# Altium PCB Sheet1.PcbDoc
Units mil, origin at the board's own origin, x right, y up, seen from the top; angles counter-clockwise.
Board outline 2225 x 1800 mil, 2 copper layers (Top Layer, Bottom Layer), stack 33.512 mil thick; 20 components, 48 nets, 142 pads, 19 vias.
Unrouted connection lines stored in the file: 1.
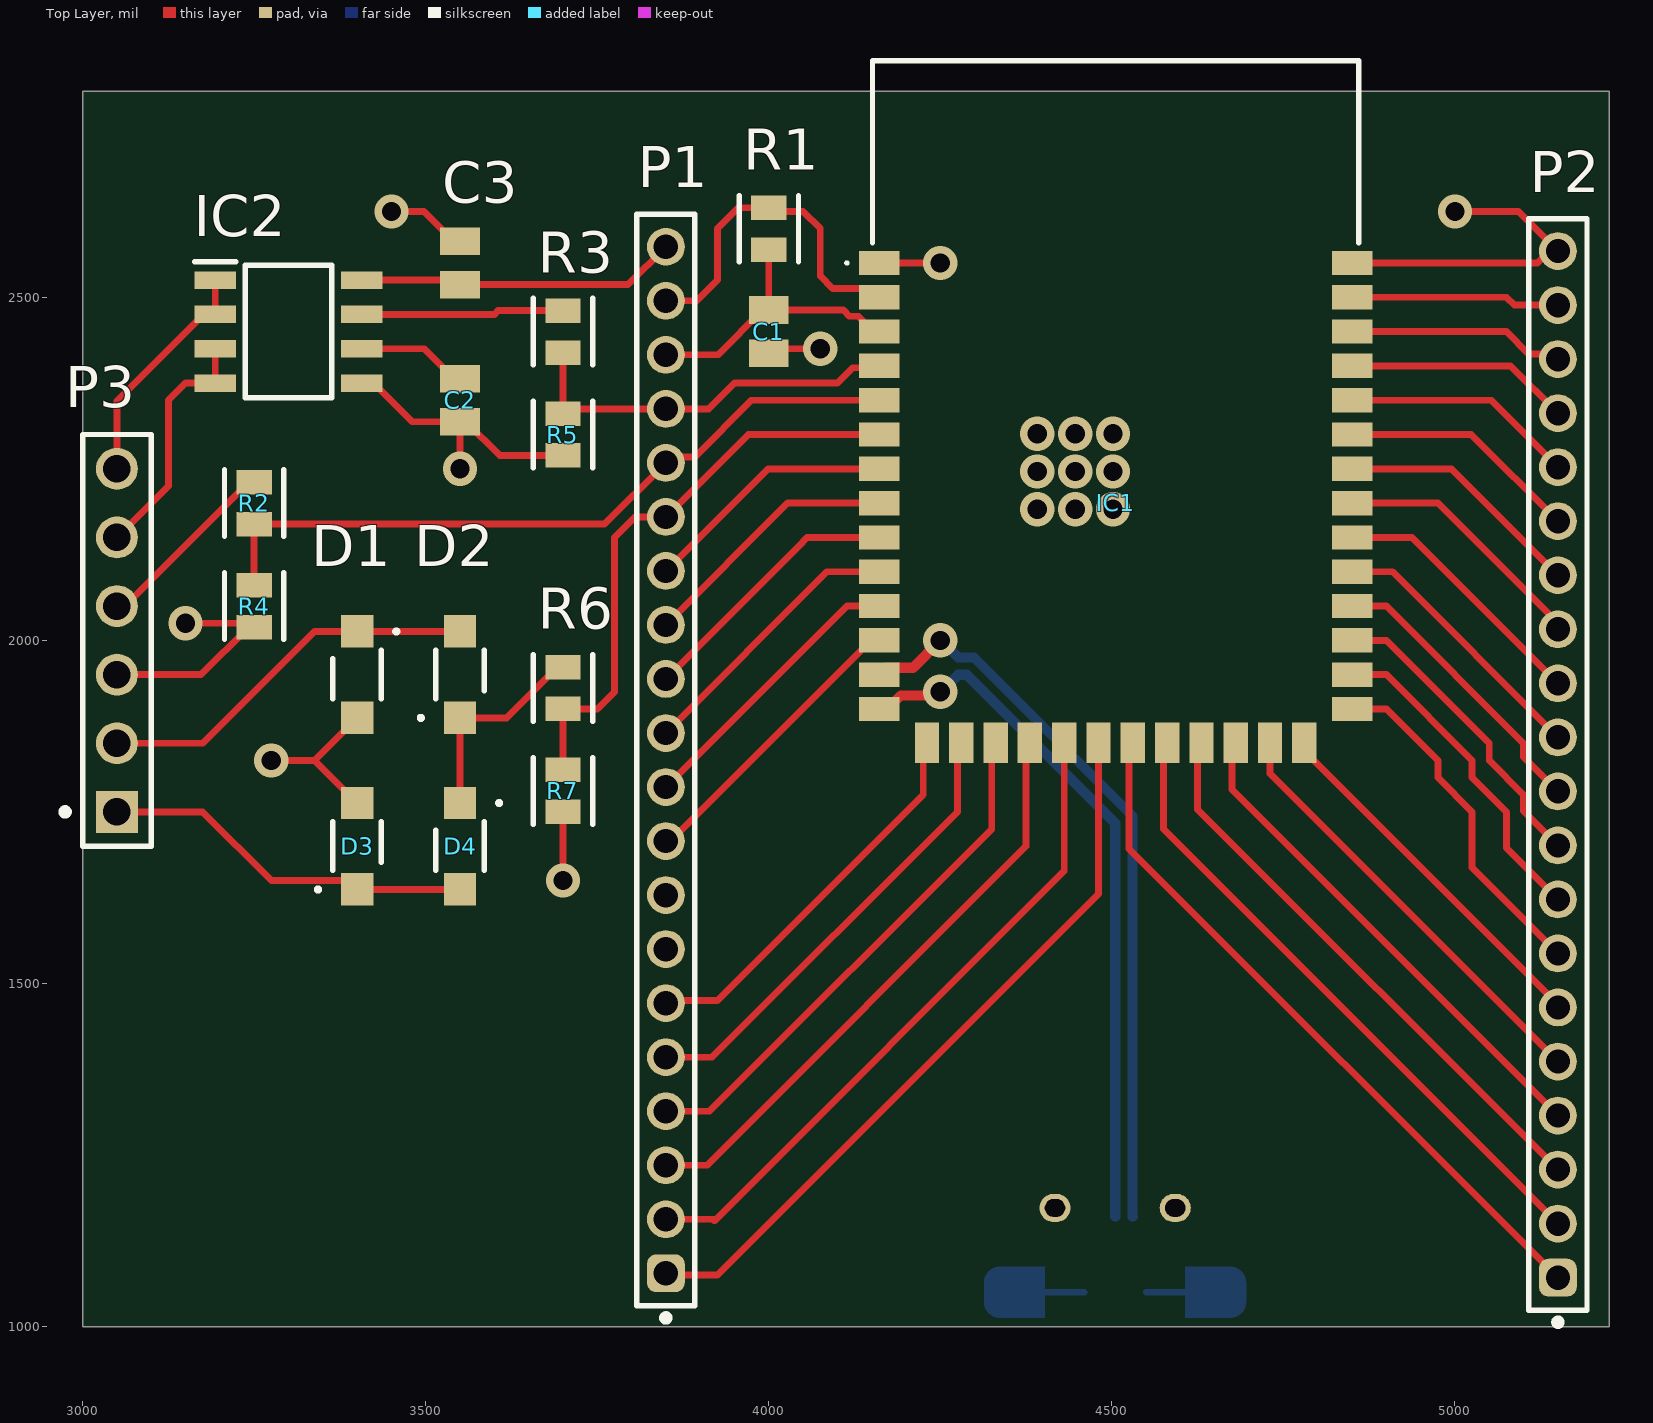
[diagram p0: Top Layer view]
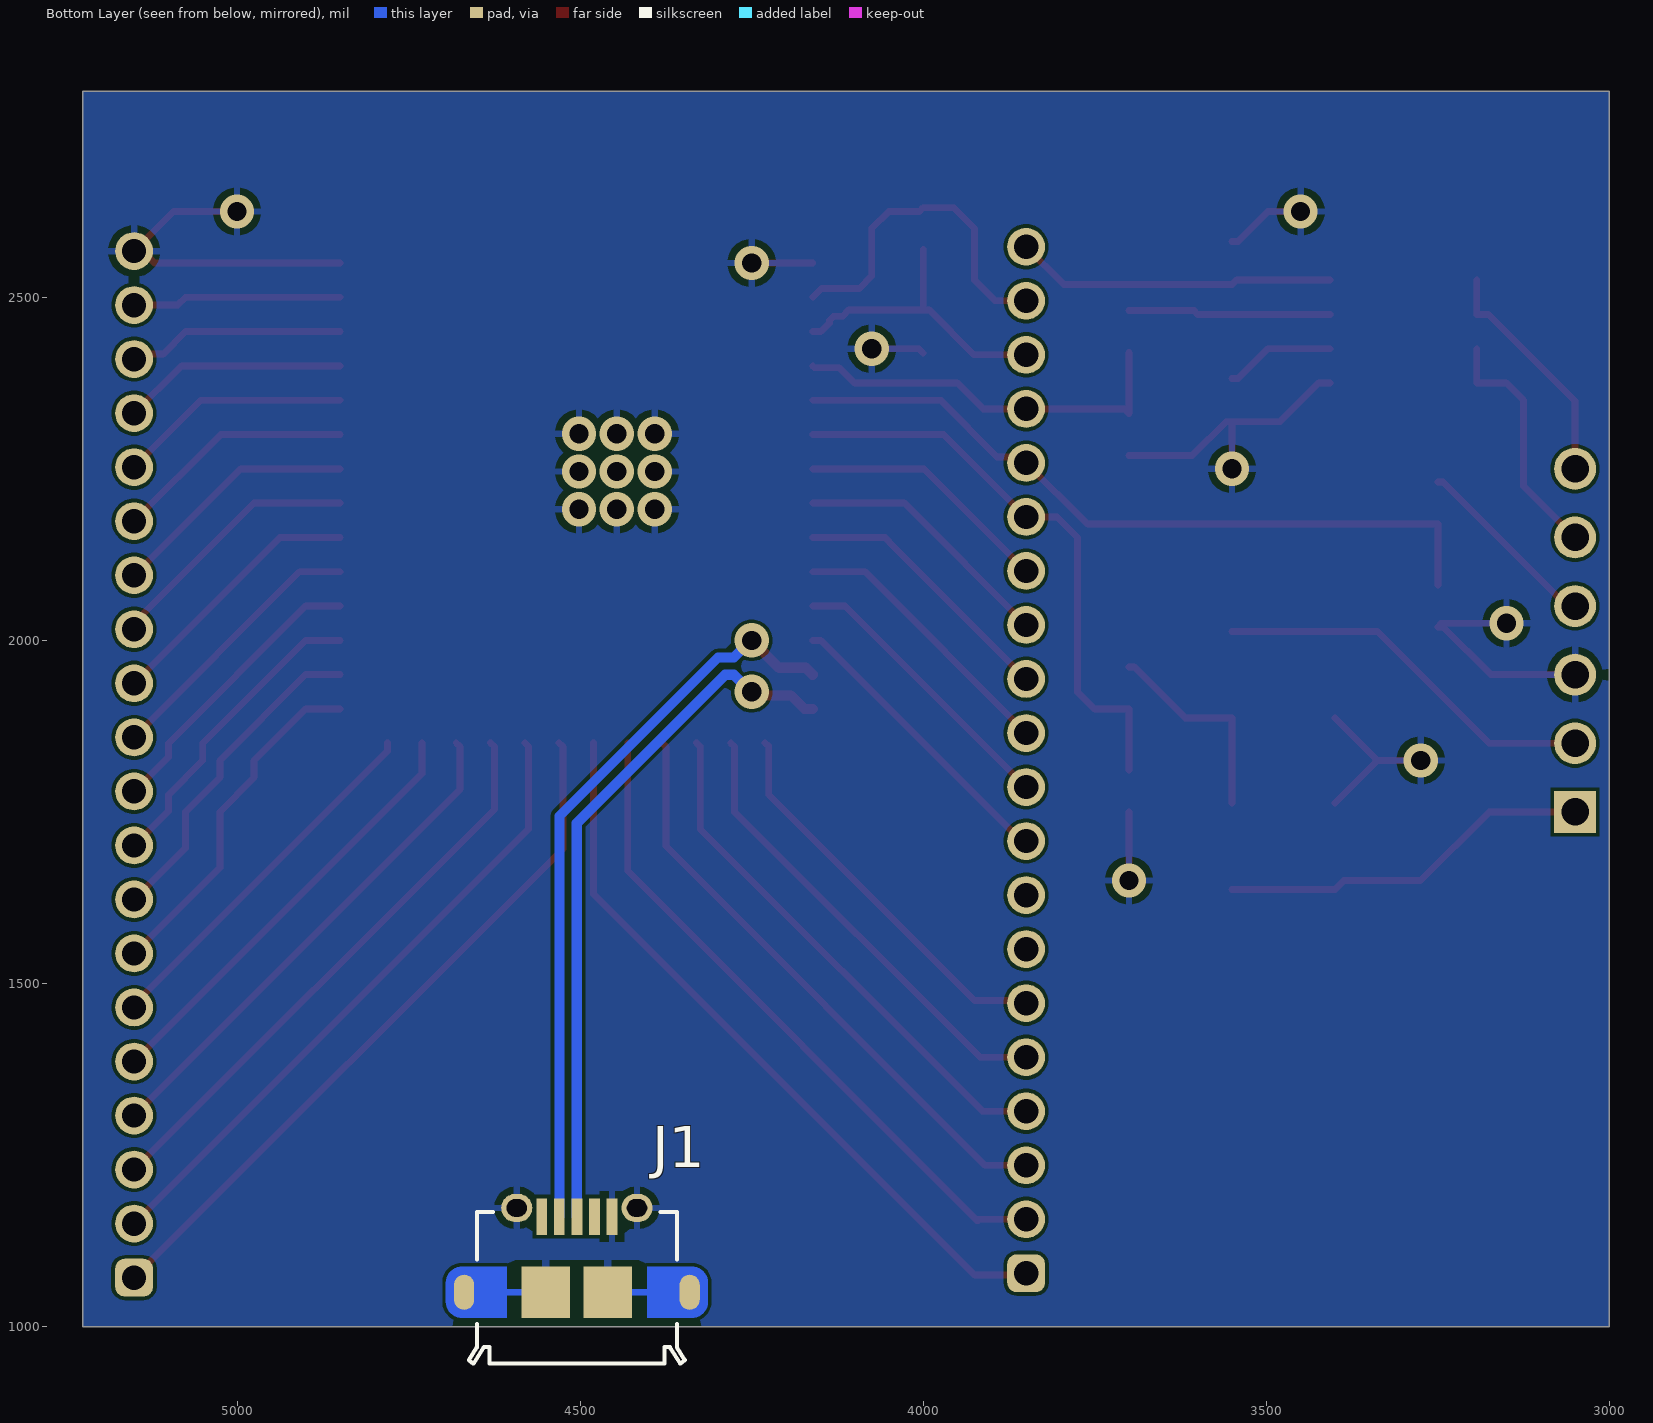
[diagram p1: Bottom Layer view, seen from below]
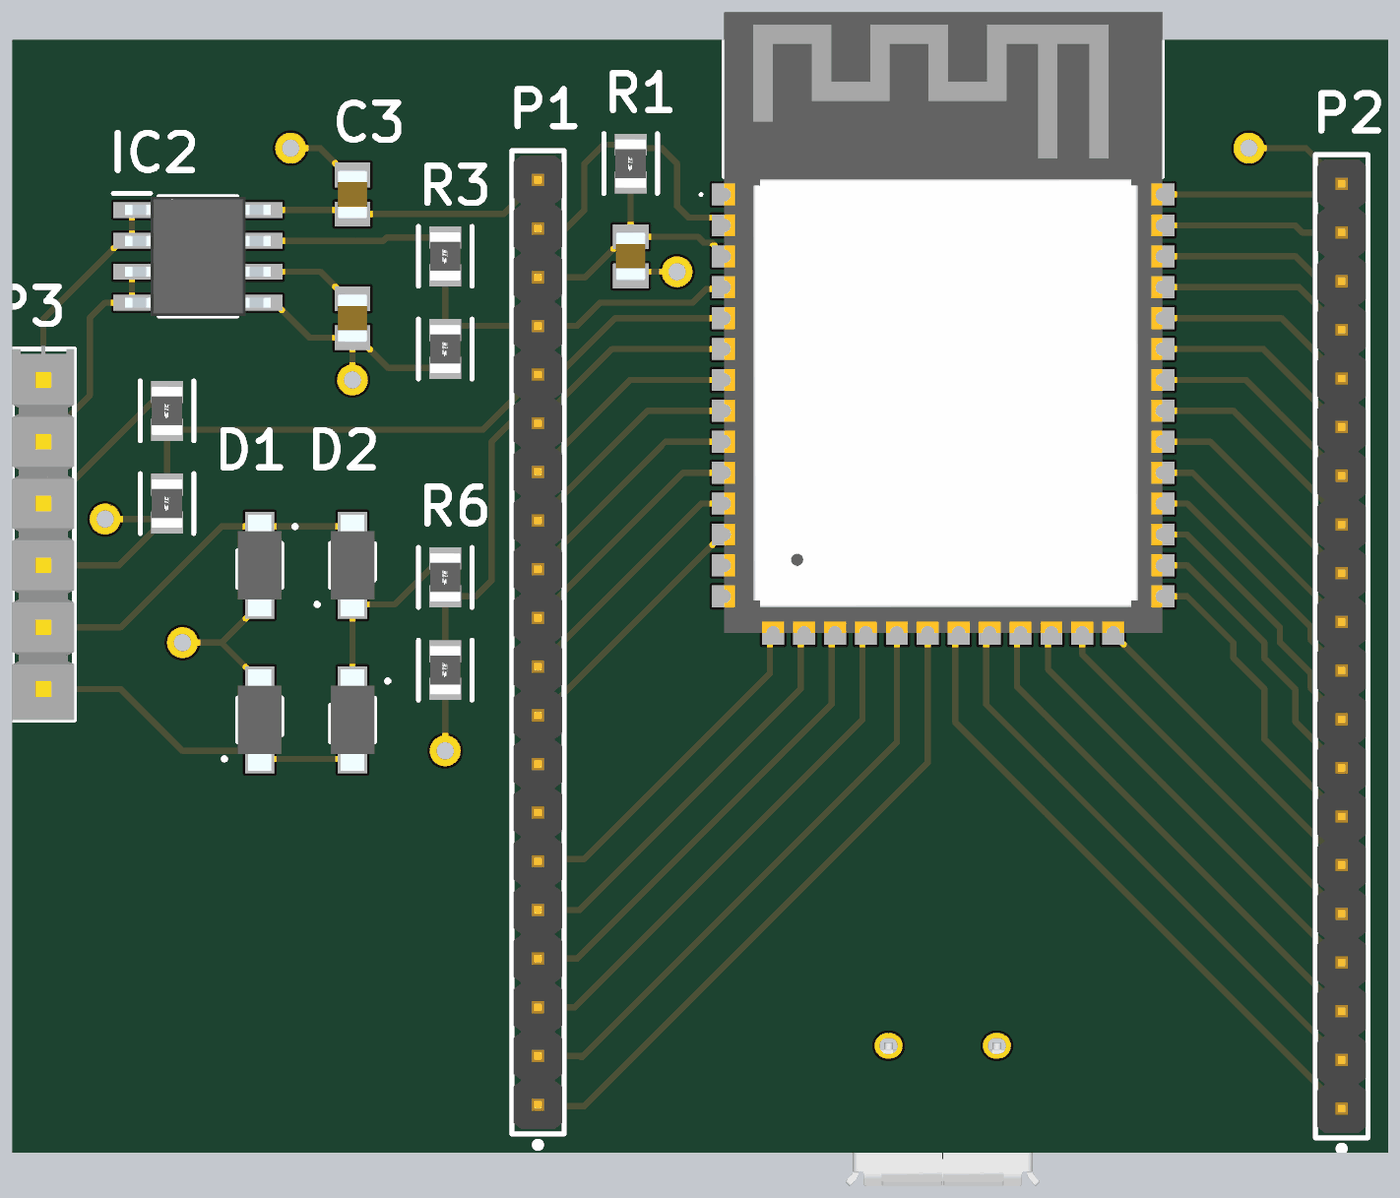
[diagram p2: 3D render of the assembled board from above, using the file's embedded part models]

## Layer stack, top to bottom
Top Solder: solder mask 0.4, Solder Resist, Dk 3.5
Top Layer: signal copper 2.7559
Dielectric 1: dielectric 28, FR-4, Dk 4.8
Bottom Layer: signal copper 2.7559
Bottom Solder: solder mask 0.4, Solder Resist, Dk 3.5

## Board outline
3000,1000 3000,2800 5225,2800 5225,1000

## Design rules (kind name [scope] priority, off if disabled: settings)
Clearance [All] p1: gap=5 ignorepadtopadclearanceinfootprint=FALSE
DiffPairsRouting [All] p1: maxlimit=10 minlimit=10 mostfreqgap=10 toplayer_minwidth=15 toplayer_maxwidth=15 toplayer_prefwidth=15 bottomlayer_minwidth=15 bottomlayer_maxwidth=15 bottomlayer_prefwidth=15 maxuncoupledlength=500
PolygonConnect [All] p1: connectstyle=Relief reliefconductorwidth=10 reliefentries=4 polygonreliefangle="90 Angle" airgapwidth=10
RoutingVias [All] p1: holewidth=28 width=50 viastyle="Through Hole" minholewidth=28 minwidth=50 maxholewidth=28 maxwidth=50
SolderMaskExpansion [All] p1: expansion=4 istentingtop=FALSE
SupplyNets "Schematic Supply Nets_3" [InNet('GND')] p1: voltage=0.000
SupplyNets "Schematic Supply Nets_2" [InNet('5V')] p2: voltage=0.000
SupplyNets "Schematic Supply Nets_1" [InNet('3V3')] p3: voltage=0.000
Width [All] p1: maxlimit=10 minlimit=10 preferedwidth=10
29 further rules are at their usual default settings.

## Classes and differential pairs
differential pair USB_D: +USB_D_P -USB_D_N

## Components (designator, comment, footprint, x,y, rotation, side; value= is the part's Value field where it differs from the comment)
C1 "1uF" CAPC2012X88N 4000,2450 r90 top
C2 "1nF" CAPC2012X88N 3550,2350 r90 top
C3 "100nF" CAPC2012X88N 3550,2550 r270 top
D1 "1N4007W" 1N4007W 3400,1950 r270 top
D2 "1N4007W" 1N4007W 3550,1950 r90 top
D3 "1N4007W" 1N4007W 3400,1700 r90 top
D4 "1N4007W" 1N4007W 3550,1700 r270 top
IC1 "ESP32-S3-WROOM-1-N16R2" ESP32S3WROOM1N16R2 4505.51,2342.91 r0 top
IC2 "ACS712ELCTR-05B-T" SOIC127P600X175-8N 3300,2450 r0 top
J1 "629105150921" 629105150921 4504.72,1050 r180 bottom
P1 "62002011121" 62002011121 3850,1825.59 r90 top
P2 "62002011121" 62002011121 5150,1819.29 r90 top
P3 "TSW-106-07-S-S" SMTC-TSW-106-07-S-S_V 3050,2000 r90 top
R1 "10K" FP-CRG0805-IPC_C 4000,2600 r90 top
R2 "5K" FP-CRG0805-IPC_C 3250,2200 r90 top
R3 "5K" FP-CRG0805-IPC_C 3700,2450 r90 top
R4 "10K" FP-CRG0805-IPC_C 3250,2050 r90 top
R5 "10K" FP-CRG0805-IPC_C 3700,2300 r90 top
R6 "5K" FP-CRG0805-IPC_C 3700,1930.55 r90 top
R7 "10K" FP-CRG0805-IPC_C 3700,1780.55 r90 top

## Footprints (in the part's own frame and the unit in brackets; to place one, negate y for a bottom-side part, rotate by r counter-clockwise, add the part's x,y. Pads: shape width x height; smd on the part's side, far side on the other; paste and mask are expansions set on the pad)
1N4007W [mm]
  rect 1.2x1.2 smd: 1(-1.6,0) 2(1.6,0)
  silkscreen extent -1.65,-0.9 0.9,1.5, body extent -2.08,-0.9 2.08,0.9, height 1.2
62002011121 [mm] "Pin Header, pitch 2.00 mm, THT, Vertical, single row, 20p"
  rrect50% 1.4x1.4 hole 0.9: 1(-19,0)
  round 1.4 hole 0.9: 2(-17,0) 3(-15,0) 4(-13,0) 5(-11,0) 6(-9,0) 7(-7,0) 8(-5,0) 9(-3,0) 10(-1,0) 11(1,0) 12(3,0) 13(5,0) 14(7,0) 15(9,0) 16(11,0) 17(13,0) 18(15,0) 19(17,0) 20(19,0)
  silkscreen extent -20.77,-1.07 20.2,1.07, body extent -20,-1 20,1, height 6.05
629105150921 [mm] "Micro USB 2.0 Type AB, Receptacle, Horizontal, SMT"
  rect 0.4x1.35 smd: 1(-1.3,2.8) 2(-0.65,2.8) 3(0,2.8) 4(0.65,2.8) 5(1.3,2.8)
  oval 0.75x1.3 smd: Shell(-4.175,0) Shell(4.175,0)
  oval 1.15x1.05 hole 0.65 slot 0.75 at 0 deg: Shell(-2.225,3.12) Shell(2.225,3.12)
  rect 1.8x1.9 smd: Shell(-1.15,0) Shell(1.15,0)
  Top Layer region: -4.25,-0.95 -4.48,-0.904 -4.674,-0.774 -4.804,-0.58 -4.85,-0.35 -4.85,-0.35 -4.85,0.35 -4.804,0.58 -4.674,0.774 -4.48,0.904 -4.25,0.95 -4.25,0.95 -2.6,0.95 -2.6,-0.95
  Top Layer pour cut-out: -4.25,-0.65 -4.365,-0.627 -4.462,-0.562 -4.527,-0.465 -4.55,-0.35 -4.55,-0.35 -4.55,0.35 -4.527,0.465 -4.462,0.562 -4.365,0.627 -4.25,0.65 -4.25,0.65 -4.1,0.65 -3.985,0.627 -3.888,0.562 -3.823,0.465 -3.8,0.35 -3.8,0.35 -3.8,-0.35 -3.823,-0.465 -3.888,-0.562 -3.985,-0.627 -4.1,-0.65 -4.1,-0.65
  Top Layer region: 4.25,-0.95 4.48,-0.904 4.674,-0.774 4.804,-0.58 4.85,-0.35 4.85,-0.35 4.85,0.35 4.804,0.58 4.674,0.774 4.48,0.904 4.25,0.95 4.25,0.95 2.6,0.95 2.6,-0.95
  silkscreen extent -4,-2.64 4,2.97, body extent -4.3,-2.64 4.3,3.23, height 2.76
CAPC2012X88N [mm]
  rect 1.02x1.47 smd: 1(-0.8,0) 2(0.8,0)
  body extent -1,-0.63 1,0.63, height 0.88
ESP32S3WROOM1N16R2 [mm]
  rect 1.5x0.9 smd: 1(-8.75,5.26) 2(-8.75,3.99) 3(-8.75,2.72) 4(-8.75,1.45) 5(-8.75,0.18) 6(-8.75,-1.09) 7(-8.75,-2.36) 8(-8.75,-3.63) 9(-8.75,-4.9) 10(-8.75,-6.17) 11(-8.75,-7.44) 12(-8.75,-8.71) 13(-8.75,-9.98) 14(-8.75,-11.25) 27(8.75,-11.25) 28(8.75,-9.98) 29(8.75,-8.71) 30(8.75,-7.44) 31(8.75,-6.17) 32(8.75,-4.9) 33(8.75,-3.63) 34(8.75,-2.36) 35(8.75,-1.09) 36(8.75,0.18) 37(8.75,1.45) 38(8.75,2.72) 39(8.75,3.99) 40(8.75,5.26)
  rect 0.9x1.5 smd: 15(-6.985,-12.5) 16(-5.715,-12.5) 17(-4.445,-12.5) 18(-3.175,-12.5) 19(-1.905,-12.5) 20(-0.635,-12.5) 21(0.635,-12.5) 22(1.905,-12.5) 23(3.175,-12.5) 24(4.445,-12.5) 25(5.715,-12.5) 26(6.985,-12.5)
  rect 0.9x0.9 smd: 41(-1.5,-2.46) 42(-2.9,-1.06) 43(-2.9,-2.46) 44(-2.9,-3.86) 45(-1.5,-3.86) 46(-0.1,-3.86) 47(-0.1,-2.46) 48(-0.1,-1.06) 49(-1.5,-1.06)
  silkscreen extent -10,5.21 9,12.75, body extent -9,-12.75 9,12.75, height 3.25
FP-CRG0805-IPC_C [mil]
  rect 35.67x51.46 smd paste+0 mask+0: 1(-30.55,0) 2(30.55,0)
  silkscreen extent -48,-43 48,43, body extent -52,-31 52,31, height 10
SMTC-TSW-106-07-S-S_V [mm] "Header, 6-Leads, Body 15.24x2.54mm, Pitch 2.54mm"
  rect 1.55x1.55 hole 1.02: 1(-6.35,0)
  round 1.55 hole 1.02: 2(-3.81,0) 3(-1.27,0) 4(1.27,0) 5(3.81,0) 6(6.35,0)
  silkscreen extent -7.62,-1.27 7.62,2.04, body extent -7.62,-1.27 7.75,1.27, height 8.38
SOIC127P600X175-8N [mm]
  rect 1.525x0.65 smd: 1(-2.712,1.905) 2(-2.712,0.635) 3(-2.712,-0.635) 4(-2.712,-1.905) 5(2.712,-1.905) 6(2.712,-0.635) 7(2.712,0.635) 8(2.712,1.905)
  silkscreen extent -3.47,-2.45 1.6,2.58, body extent -3,-2.45 3,2.45, height 1.75

## Part data
C1 C2 C3: library part C0805C104K5RAC7411, "Capacitor", Manufacturer_Name=KEMET, Mouser Part Number=80-C0805C104K5RACLR, Arrow Part Number=C0805C104K5RAC7411, Arrow Price/Stock=https://www.arrow.com/en/products/c0805c104k5rac7411/kemet-corporation, Datasheet Link=https://www.mouser.com/datasheet/2/212/KEM_C1002_X7R_SMD-1102033.pdf, Height=0.88mm, Manufacturer_Part_Number=C0805C104K5RAC7411, Mouser Price/Stock=https://www.mouser.co.uk/ProductDetail/KEMET/C0805C104K5RAC7411?qs=jbRM9o5BbzPcVXF0wW9AYg%3D%3D
D1 D2 D3 D4: "Diode", Manufacturer_Name="Jingdao Microelectronics", Datasheet Link=https://datasheet.lcsc.com/szlcsc/Shandong-Jingdao-Microelectronics-1N4007W_C108803.pdf, Height=1.1mm, Manufacturer_Part_Number=1N4007W
IC1: "Integrated Circuit", Manufacturer_Name="Espressif Systems", Mouser Part Number=356-ESP32S3WRM1N16R2, Datasheet Link=https://www.espressif.com/sites/default/files/documentation/esp32-s3-wroom-1_wroom-1u_datasheet_en.pdf, Height=3.25mm, Manufacturer_Part_Number=ESP32-S3-WROOM-1-N16R2, Mouser Price/Stock=https://www.mouser.co.uk/ProductDetail/Espressif-Systems/ESP32-S3-WROOM-1-N16R2?qs=Li%252BoUPsLEnvy1bxV65eH%2Fw%3D%3D
IC2: "Integrated Circuit", Manufacturer_Name="Allegro Microsystems", Mouser Part Number=250-712ELCTR05BT, Arrow Part Number=ACS712ELCTR-05B-T, Arrow Price/Stock=https://www.arrow.com/en/products/acs712elctr-05b-t/allegro-microsystems?utm_currency=USD&region=nac, Datasheet Link=https://www.allegromicro.com/~/media/Files/Datasheets/ACS712-Datasheet.ashx, Height=1.75mm, Manufacturer_Part_Number=ACS712ELCTR-05B-T, Mouser Price/Stock=https://www.mouser.co.uk/ProductDetail/Allegro-MicroSystems/ACS712ELCTR-05B-T?qs=pUKx8fyJudDs65Rkshv5ug%3D%3D
J1: library part CMP-1502-03249-5, Contact Resistance=30mΩ, Current Rating=1.8A, Insulation Resistance=1GΩ, Max Operating Temperature=85°C, Min Operating Temperature=-40°C, Operating Supply Voltage=30V, Connector Type=USB, Contact Material=Gold, Contact Plating=Gold, Features=Shielded, Gender=Receptacle, Height=2.82mm, Mount="Horizontal, Surface Mount", NexarPartId=52645114, Number of Contacts=5, Number of Pins=5, Orientation=Horizontal, Packaging="Tape and Reel", REACH SVHC=Unknown, RoHS=Compliant, Termination=SMD/SMT, USB Standard="USB 2.0", Voltage Rating=30V
P1 P2: library part CMP-1502-00967-3, Contact Resistance=20mΩ, Current Rating=2A, Operating Supply Voltage=200V, Gender=Male, Lead Pitch=2mm, NexarPartId=61924788, Number of Pins=20, Orientation=Vertical, RoHS=Non-Compliant
P3: library part CMP-1681-00007-2, "Male Header, Pitch 2.54 mm, 1 x 6 Position, Height 8.38 mm, Tail Length 2.54 mm, -55 to 125 degC, RoHS, Bulk", Colour=Black, Manufacturer=Samtec, Max Operating Temperature="125 degC", Min Operating Temperature="-55 degC", Package Quantity=1, ComponentLink1Description="Manufacturer URL", ComponentLink1URL=http://www.samtec.com/, ComponentLink2Description=Datasheet, ComponentLink2URL=http://suddendocs.samtec.com/catalog_english/tsw_th.pdf, ComponentLink3Description="Package Specification", ComponentLink3URL=http://suddendocs.samtec.com/prints/tsw-xxx-xx-x-x-xx-xxx-footprint.pdf, Contact Finish=Gold, Contact Material=Bronze, Contact Plating=Gold, DatasheetVersion=12/2015, Height="8.38 mm", Lead Pitch="0.1 inch", Length="15.24 mm", Mount="Through Hole", Mounting Technology="Through Hole", PackageDescription="Male Header, Pitch 2.54 mm, 1 x 6 Position, Height 8.38 mm, Tail Length 2.54 mm", PackageReference=TSW-102-07-S-S, Packaging=Bulk, Pins=6, RoHSCompliant=true, Rows=1
R1 R2 R3 R4 R5 R6 R7: library part CMP-03211-011401-1, "RES SMD 10K OHM 1% 1/8W 0805", Case/Package=0805, Max Operating Temperature=125°C, Min Operating Temperature=-55°C, Number of Resistors=1, Power Rating=125mW, Resistance=10kR, Resistor Type="Thick Film", Temperature Coefficient=100ppm/°C, Tolerance=1%, Voltage Rating=150V, Depth=1.25mm, ELV=Compliant, Height=0.55mm, Length=2mm, Mount="Surface Mount", Number of Terminations=2, Packaging="Tape and Reel", Radiation Hardening=No, RoHS Compliant=Yes, Series="CRG Series", Technology="THICK FILM", Termination=Solder

## Via types
v1: diameter 50, hole 28, Top Layer to Bottom Layer, 19 vias

## Nets (pads, with @x,y where several pads share a name; then routed paths per layer and width w, separated by ;. In a path a pad name is that pad's centre, name@x,y a point inside that pad or via, vN(x,y) a via of type N, cw(c..) or ccw(c..) an arc to the next point about the centre after c; other vN are vias at no path point)
3V3: IC1.2 P1.19 R1.2 | length 505.7
  Top Layer w10: P1.19 3894.88,2494.88 3925,2525 3925,2600 3955.55,2630.55 R1.2 4005.55,2625 4050,2625 4075,2600 4075,2530.86 4093.14,2512.72 4148.31,2512.72 IC1.2
5V: C3.2 IC2.8 P1.20 | length 468.7
  Top Layer w10: IC2.8 3543.5,2525 C3.2 3794.88,2518.5 P1.20
5V_AC: D1.1 D2.2 P3.2 | length 567.5
  Top Layer w10: P3.2 3175,1850 3337.99,2012.99 D1.1 D2.2
5V_AC_GND: D3.1 D4.2 P3.1 | length 546.8
  Top Layer w10: P3.1 3175,1750 3275,1650 3387.01,1650 D3.1 D4.2
5V_ACtoDC: D2.1 D4.1 R6.2 | length 304.7
  Top Layer w10: D4.1 D2.1 3618.01,1887.01 3692.11,1961.11 R6.2
5V_DC: P3.4 R2.2 | length 274.8
  Top Layer w10: P3.4 3061.55,2050 3242.11,2230.55 R2.2
EN: C1.2 IC1.3 P1.18 R1.1 | length 441.3
  Top Layer w10: P1.18 3925.79,2416.14 3991.14,2481.5 C1.2 ; R1.1 C1.2 ; IC1.3 4149.21,2450 4136.5,2462.72 4136.5,2466.43 4130.64,2472.28 4117.72,2472.28 4108.5,2481.5 C1.2
FIL: C2.2 IC2.6 | length 161.2
  Top Layer w10: IC2.6 3497.64,2425 3541.14,2381.5 C2.2
GND: C1.1 C2.1 C3.1 D1.2 D3.2 IC1.1 IC1.40 IC1.41 IC1.42 IC1.43 IC1.44 IC1.45 IC1.46 IC1.47 IC1.48 IC1.49 IC2.5 J1.5 J1.Shell P2.20 P3.3 R4.1 R5.1 R7.1 | length 2078.8
  Top Layer w10: P3.3 3172.66,1950 3242.11,2019.45 R4.1 3244.45,2025 v1(3150,2025) ; v1(3275,1825) 3337.99,1825 ; D3.2 3337.99,1825 ; D1.2 3337.99,1825 ; IC2.5 3424,2375 3480.49,2318.5 C2.1 ; v1(3450,2625) 3497.64,2625 3541.14,2581.5 C3.1 ; v1(3550,2250) C2.1 ; v1(3700,1650) R7.1 ; R5.1 3607.92,2269.45 3558.86,2318.5 C2.1 ; C1.1 4006.5,2425 v1(4075,2425) ; IC1.1 v1(4250,2550) ; IC1.40 5120.47,2550 5137.79,2567.32 P2.20 5092.32,2625 v1(5000,2625)
  Bottom Layer w10: J1.Shell@4340.35,1050 J1.Shell@4459.45,1050 ; J1.Shell@4550,1050 J1.Shell@4669.09,1050
  other v1: 4391.34,2190.94 4446.46,2190.94 4501.57,2190.94 4391.34,2246.06 4446.46,2246.06 4501.57,2246.06 4391.34,2301.18 4446.46,2301.18 4501.57,2301.18
I_IN_N: IC2.3 IC2.4 P3.5 | length 359.6
  Top Layer w10: P3.5 3125,2225 3125,2350 3150,2375 IC2.4 IC2.3
I_IN_P: IC2.1 IC2.2 P3.6 | length 344.4
  Top Layer w10: P3.6 3050,2349 3176,2475 IC2.2 IC2.1
IO0: IC1.27 P2.7 | length 509.9
  Top Layer w10: IC1.27 4900,1900 4975,1825 4975,1800 5025,1750 5025,1668.7 P2.7
IO1: IC1.39 P2.19 | length 304.7
  Top Layer w10: IC1.39 5075,2500 5086.42,2488.58 P2.19
IO2: IC1.38 P2.18 | length 316.6
  Top Layer w10: IC1.38 5075,2450 5107.44,2417.56 5142.28,2417.56 P2.18
IO3: IC1.15 P1.6 | length 578.9
  Top Layer w10: P1.6 3853.74,1475 3925,1475 4225,1775 4225,1845.28 IC1.15
IO4: IC1.4 P1.17 R3.1 R5.2 | length 578.7
  Top Layer w10: R3.1 R5.2 3706.85,2337.4 P1.17 3912.4,2337.4 3950,2375 4100,2375 4122.35,2397.35 4158.38,2397.35 IC1.4
IO5: IC1.5 P1.16 R2.1 R4.2 | length 1074.7
  Top Layer w10: R4.2 R2.1 3760.78,2169.45 P1.16 3858.63,2267.29 3892.29,2267.29 3975,2350 IC1.5
IO6: IC1.6 P1.15 R6.1 R7.2 | length 847.4
  Top Layer w10: R7.2 R6.1 3750,1900 3775,1925 3775,2150 3804.92,2179.92 P1.15 3970.08,2300 IC1.6
IO7: IC1.7 P1.14 | length 372.7
  Top Layer w10: P1.14 3998.82,2250 IC1.7
IO8: IC1.12 P1.9 | length 432.2
  Top Layer w10: P1.9 3856.69,1707.48 4149.21,2000 IC1.12
IO9: IC1.17 P1.4 | length 773.4
  Top Layer w10: P1.4 3913.78,1313.78 4325,1725 4325,1845.28 IC1.17
IO10: IC1.18 P1.3 | length 870.7
  Top Layer w10: P1.3 3910.04,1235.04 4375,1700 4375,1845.28 IC1.18
IO11: IC1.19 P1.2 | length 979.5
  Top Layer w10: P1.2 3918.7,1156.3 3920.86,1154.14 4430.51,1663.8 IC1.19
IO12: IC1.20 P1.1 | length 1081.9
  Top Layer w10: P1.1 3852.56,1075 3925,1075 4480.51,1630.51 IC1.20
IO13: IC1.21 P2.1 | length 1040.7
  Top Layer w10: IC1.21 4525,1845.28 4525,1696.26 P2.1
IO14: IC1.22 P2.2 | length 941.2
  Top Layer w10: IC1.22 4575,1845.28 4575,1725 P2.2
IO15: IC1.8 P1.13 | length 384.6
  Top Layer w10: P1.13 4027.56,2200 IC1.8
IO16: IC1.9 P1.12 | length 396.7
  Top Layer w10: P1.12 4050,2143.7 4050,2144.14 4055.86,2150 IC1.9
IO17: IC1.10 P1.11 | length 408.4
  Top Layer w10: P1.11 4085.04,2100 IC1.10
IO18: IC1.11 P1.10 | length 420.3
  Top Layer w10: P1.10 4113.78,2050 IC1.11
IO21: IC1.23 P2.3 | length 841.8
  Top Layer w10: IC1.23 4625,1845.28 4625,1753.74 P2.3
IO35: IC1.28 P2.8 | length 481.1
  Top Layer w10: IC1.28 4900,1950 5025,1825 5025,1800 5075,1750 5075,1697.44 P2.8
IO36: IC1.29 P2.9 | length 452.4
  Top Layer w10: IC1.29 4900,2000 5050,1850 5050,1825 5100,1775 5100,1751.18 P2.9
IO37: IC1.30 P2.10 | length 423.6
  Top Layer w10: IC1.30 4900,2050 5100,1850 5100,1829.92 P2.10
IO38: IC1.31 P2.11 | length 400
  Top Layer w10: IC1.31 4908.66,2100 P2.11
IO39: IC1.32 P2.12 | length 388.1
  Top Layer w10: IC1.32 4937.4,2150 P2.12
IO40: IC1.33 P2.13 | length 381.3
  Top Layer w10: IC1.33 4975,2200 5150,2025 P2.13
IO41: IC1.34 P2.14 | length 364.3
  Top Layer w10: IC1.34 4994.88,2250 P2.14
IO42: IC1.35 P2.15 | length 352.3
  Top Layer w10: IC1.35 5023.62,2300 P2.15
IO45: IC1.26 P2.6 | length 538.9
  Top Layer w10: IC1.26 4780.51,1838.98 5150,1469.49 P2.6
IO46: IC1.16 P1.5 | length 676.1
  Top Layer w10: P1.5 3917.52,1392.52 4275,1750 4275,1845.28 IC1.16
IO47: IC1.24 P2.4 | length 742.3
  Top Layer w10: IC1.24 4675,1845.28 4675,1782.48 P2.4
IO48: IC1.25 P2.5 | length 638.3
  Top Layer w10: IC1.25 4730.51,1805.71 P2.5
RXD0: IC1.36 P2.16 | length 340.4
  Top Layer w10: IC1.36 5052.36,2350 P2.16
TXD0: IC1.37 P2.17 | length 328.5
  Top Layer w10: IC1.37 5081.1,2400 P2.17
USB_D_N: IC1.13 J1.2 | length 1079.7
  Top Layer w15: IC1.13 4171.24,1960.22 4210.22,1960.22 v1(4250,2000)
  Bottom Layer w15: v1(4250,2000) 4251.29,2000 4276.29,1975 4299.07,1975 4530.02,1744.05 4530.02,1160.53 J1.2
USB_D_P: IC1.14 J1.3 | length 1027.9
  Top Layer w15: IC1.14 4172.83,1900 4192.62,1919.78 4244.78,1919.78 v1(4250,1925)
  Bottom Layer w15: v1(4250,1925) 4251.29,1925 4276.29,1950 4288.71,1950 4505.02,1733.69 4505.02,1160.53 J1.3
VIOUT: IC2.7 R3.2 | length 295.5
  Top Layer w10: IC2.7 3600,2475 3605.55,2480.55 R3.2
pads on no net: J1.1 J1.4 P1.7 P1.8

## Polygon pours and split planes (outlines as drawn)
GND on Bottom Layer "GND_L02_P001" (solid, pour order 1): 3000,2800 3000,1000 5225,1000 5225,2800

## Text inside footprints (layer, text, board x,y; h text height)
J1: Bottom 3D Body "PCB Edge" at 4579.53,963.39 h24